# EAGLE board rocketnet-daughter-18-RA-down (EAGLE 6.6.0)
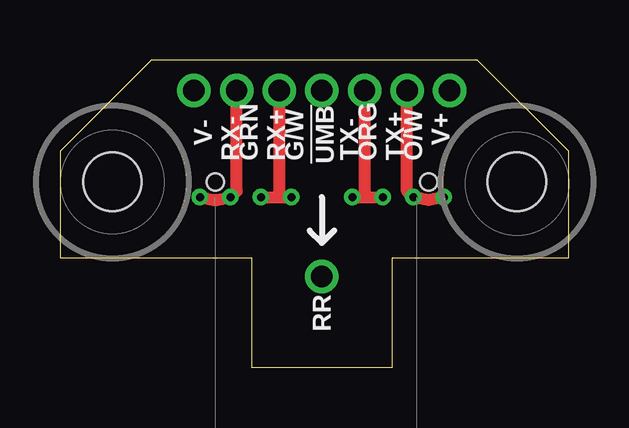
[diagram p0: board, top side]
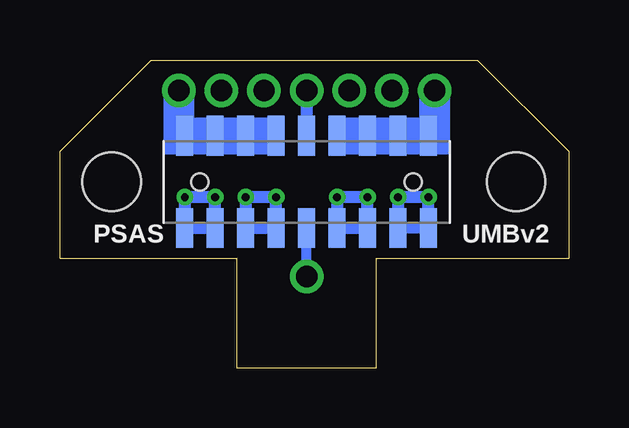
[diagram p1: board, bottom side, seen from below]

Size 21.21 x 12.83 mm. Coordinates in mm from the lower left corner, seen from the top.
Outline: 21.21,4.57 21.21,9.02 17.4,12.83 3.81,12.83 0,9.02 0,4.57 8,4.57 8,0 13.84,0 13.84,4.57 21.21,4.57
Copper layers (1*16): Top 0.0356mm / dielectric 1.5011mm / Bottom 0.0356mm
Design rules "OSH-Park-2-layer *": minimum track width 6mil, minimum drill 13mil, track to track 6mil, track to pad 6mil, pad to pad 6mil, via to via 6mil, smd to smd 6mil, copper to edge 15mil, drill to drill 6mil, minimum pad ring 7mil, minimum via ring 7mil, stop-mask expansion 3mil, vias tented up to drill 20mil, thermal gap 10mil
Holes 2.44 mm at 19.06,7.75 2.19,7.75

## Footprints (pad centres in the part's own frame; a part is rotated, then mirrored left to right if it is on the bottom)
HARWIN-M50-31509-NO-HOLES = smd 0.71 x 1.65: 1 -5.08,-1.925; 2 -5.08,1.925; 3 -3.81,-1.925; 4 -3.81,1.925; 5 -2.54,-1.925; 6 -2.54,1.925; 7 -1.27,-1.925; 8 -1.27,1.925; 9 0,-1.925; 10 0,1.925; 11 1.27,-1.925; 12 1.27,1.925; 13 2.54,-1.925; 14 2.54,1.925; 15 3.81,-1.925; 16 3.81,1.925; 17 5.08,-1.925; 18 5.08,1.925 | hole 0.71: 4.445,0; -4.445,0

## Placement (x,y rotation side)
E$1  [HARWIN-M50-31509-NO-HOLES]  10.92,7.75 0 bottom

## Library data of the parts
E$1 = rocketnet-connector

## Tracks (layer width: path | path; a pad name or v marks a point on that pad's centre or on a via)
!UD  (via drill 0.89 pad 1.4)
  Bottom 0.406: v10.92,3.81 10.92,5.84
RR  (via drill 0.89 pad 1.4)
  Bottom 0.508: v10.92,11.56 10.92,9.53
RX+  (via drill 0.33, 0.89 pad 1.4)
  Top 0.508: v8.38,7.11 9.14,7.11 | 9.14,7.11 v9.65,7.11 | v9.14,11.56 9.14,7.11
  Bottom 0.508: 8.38,5.84 v8.38,7.11 v9.65,7.11 9.65,5.84 8.38,5.84
RX-  (via drill 0.33, 0.89 pad 1.4)
  Top 0.508: v5.84,7.11 6.48,6.98 v7.11,7.11 7.37,7.37 v7.37,11.56
  Bottom 0.508: 7.11,5.84 v7.11,7.11 v5.84,7.11 5.84,5.84 7.11,5.84 | 7.11,5.84 7.11,5.71
TX+  (via drill 0.33, 0.89 pad 1.4)
  Top 0.508: v16,7.11 15.37,6.98 v14.73,7.11 14.48,7.37 v14.48,11.56
  Bottom 0.508: 14.73,5.84 v14.73,7.11 v16,7.11 16,5.84 14.73,5.84
TX-  (via drill 0.33, 0.89 pad 1.4)
  Top 0.508: v12.7,11.56 12.7,7.11 | v12.19,7.11 12.7,7.11 | 12.7,7.11 v13.46,7.11
  Bottom 0.508: 12.19,5.84 v12.19,7.11 v13.46,7.11 13.46,5.84 12.19,5.84
VSH+  (via drill 0.89 pad 1.4)
  Bottom 0.508: v16.26,11.56 16.26,9.91 16,9.65 12.32,9.65
VSH-  (via drill 0.89 pad 1.4)
  Bottom 0.508: 9.65,9.65 5.84,9.65 5.59,9.91 v5.59,11.56
(copper drawn outside any net)
  shapes: Bottom area x4

## Text on the board
tPlace: V- | V+ | RX- | GRN | RX+ | G/W | !UMB | TX- | ORG | TX+ | O/W | RR
bPlace: UMBv2 | PSAS
Reference: TOP VIEW (M50 on bottom of board) | Edge of top plate | Edge of RNH PCB | Nut OD | Tool OD | #2-56 nylock / (5/32" OD) | Wire bundle info | Brown (PWR) wire: 0.055" OD / CAT6 wire: 0.040" OD | Entire "ribbon": 0.315 in